# Altium PCB Педаль. Плата..PcbDoc
Units mm, origin at the board's own origin, x right, y up, seen from the top; angles counter-clockwise.
Board outline 25 x 25 mm, 2 copper layers (Top Layer, Bottom Layer), stack 1.07 mm thick; 13 components, 12 nets, 37 pads, 9 vias.
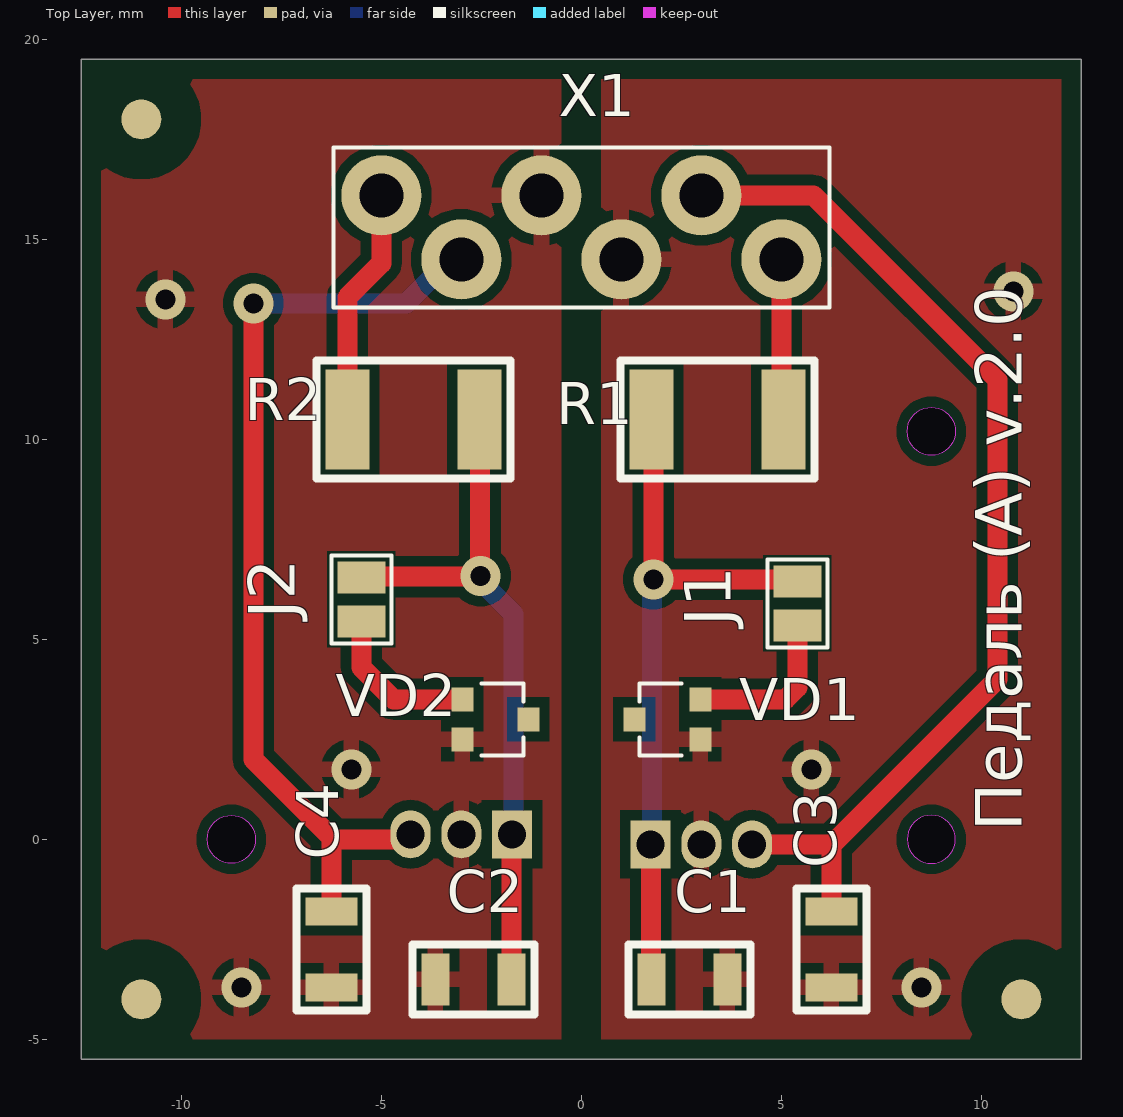
[diagram p0: Top Layer view]
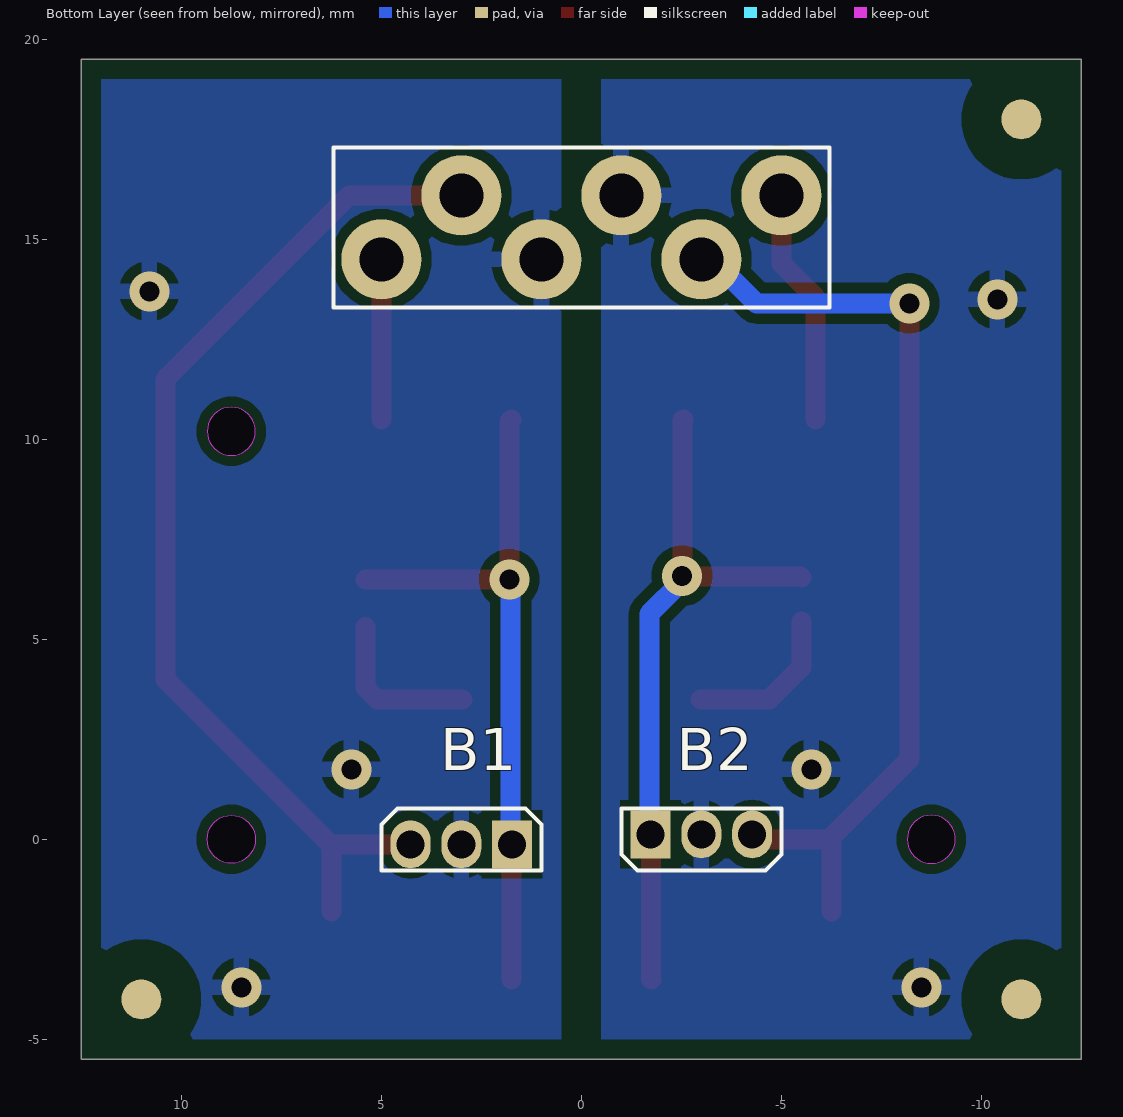
[diagram p1: Bottom Layer view, seen from below]
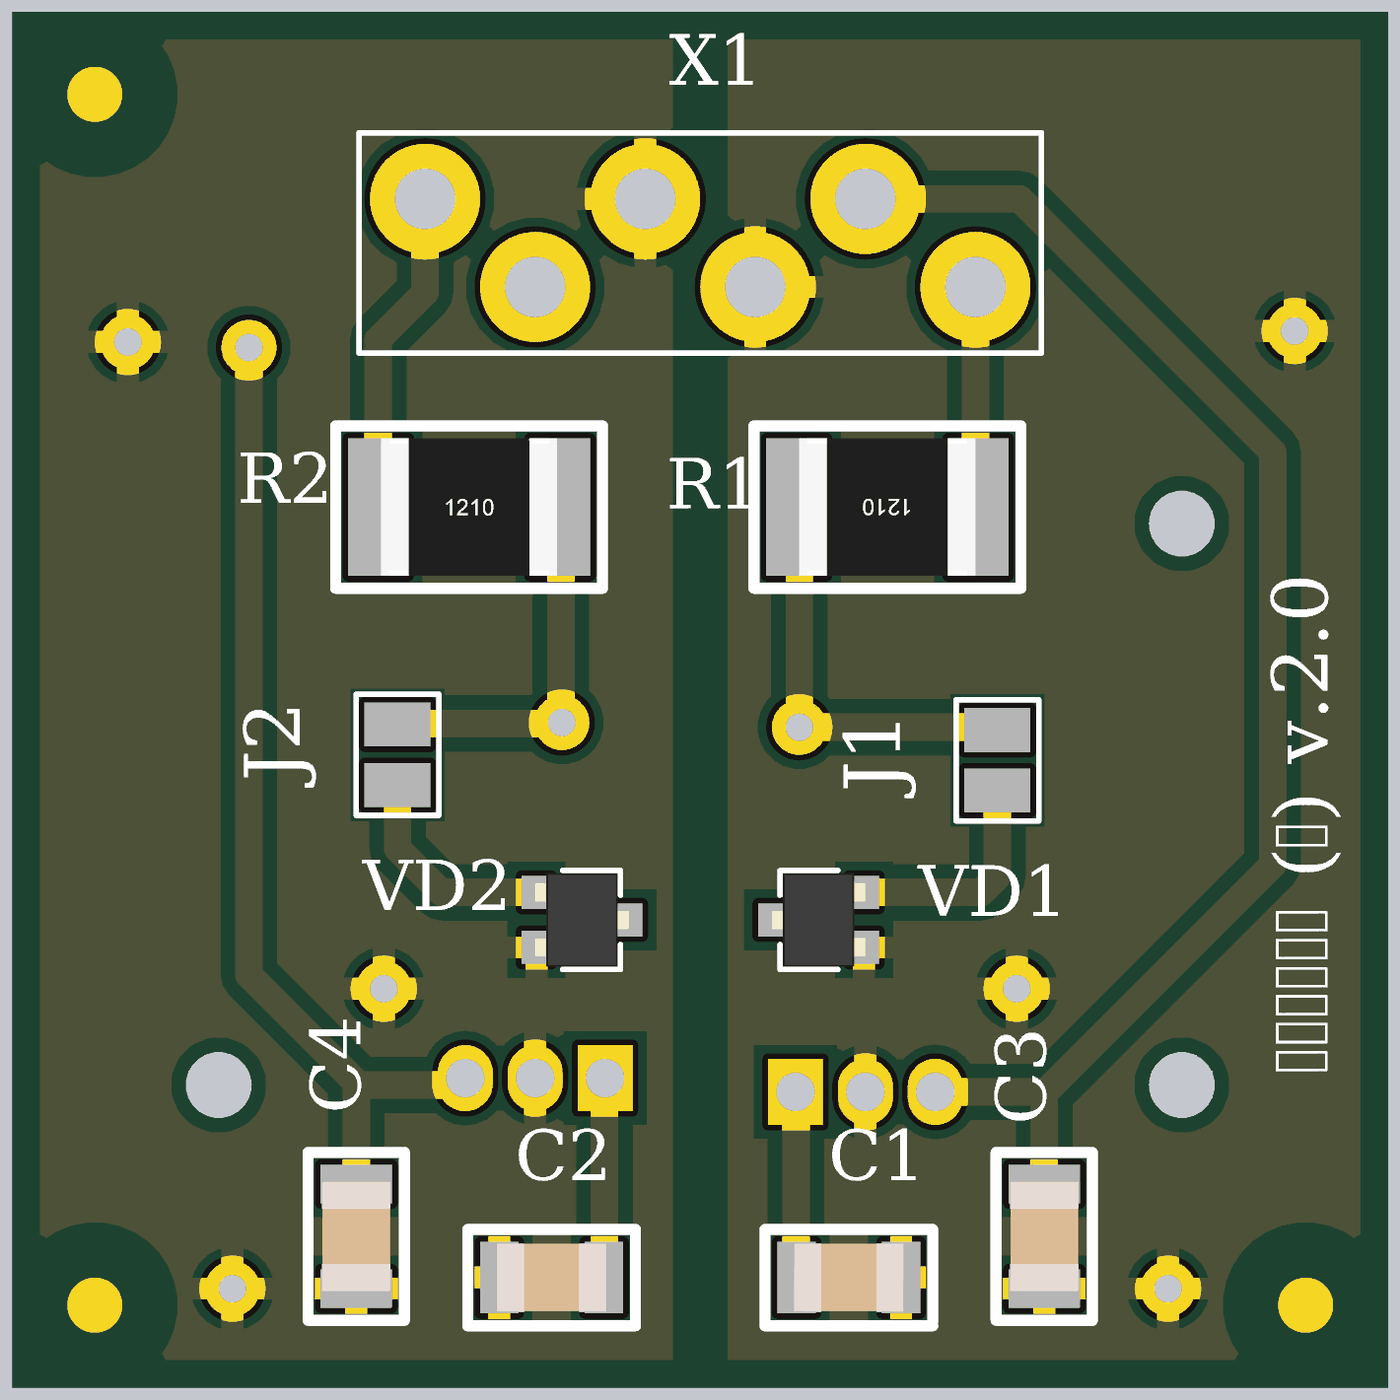
[diagram p2: 3D render of the assembled board from above, using the file's embedded part models]

## Layer stack, top to bottom
Top Solder: solder mask 0.01, Solder Resist, Dk 3.5
Top Layer: signal copper 0.035
Dielectric 1: dielectric 1, FR-4, Dk 4.8
Bottom Layer: signal copper 0.035
Bottom Solder: solder mask 0.01, Solder Resist, Dk 3.5

## Board outline
-12.5,-5.5 12.5,-5.5 12.5,19.5 -12.5,19.5
cut-out: 8.75,9.6 cw(c8.75,10.2) 8.15,10.2 cw(c8.75,10.2) 8.75,10.8 cw(c8.75,10.2) 9.35,10.2 cw(c8.75,10.2)
cut-out: 8.15,0 ccw(c8.75,0) 8.75,-0.6 ccw(c8.75,0) 9.35,0 ccw(c8.75,0) 8.75,0.6 ccw(c8.75,0)
cut-out: -8.75,-0.6 cw(c-8.75,0) -9.35,0 cw(c-8.75,0) -8.75,0.6 cw(c-8.75,0) -8.15,0 cw(c-8.75,0)

## Design rules (kind name [scope] priority, off if disabled: settings)
Clearance ReperPad_1.0mm [(ObjectKind = 'Pad') And (Component = 'Free')] p1: gap=1 ignorepadtopadclearanceinfootprint=FALSE
Clearance [All] p2: gap=0.254 ignorepadtopadclearanceinfootprint=FALSE except(0: Arc-Hole Track-Hole SMDPad-Hole THPad-Hole Via-Hole Fill-Hole Poly-Hole Region-Hole Text-Hole)
HoleSize [All] p1: absolutevalues=TRUE maxlimit=2.5 minlimit=0.3 maxpercent=80.000 minpercent=20.000
PolygonConnect [All] p1: connectstyle=Relief reliefconductorwidth=0.4 reliefentries=4 polygonreliefangle="90 Angle" airgapwidth=0.254
RoutingVias [All] p1: holewidth=0.3 width=0.6 viastyle="Through Hole" minholewidth=0.3 minwidth=0.6 maxholewidth=0.5 maxwidth=1
SolderMaskExpansion [All] p1: expansion=0.102 istentingtop=FALSE
Width [All] p1: maxlimit=2 minlimit=0.3 preferedwidth=0.3
29 further rules are at their usual default settings.

## Components (designator, comment, footprint, x,y, rotation, side; value= is the part's Value field where it differs from the comment)
B1 "TLE4997" PG-SSO-3-10 3,-0.125 r0 bottom locked
B2 "TLE4997" PG-SSO-3-10 -3,0.125 r180 bottom locked
C1 "47 нФ" C0805 2.7,-3.5 r180 top
C2 "47 нФ" C0805 -2.7,-3.5 r0 top
C3 "47 нФ" C0805 6.25,-2.75 r90 top
C4 "47 нФ" C0805 -6.25,-2.75 r90 top
J1 "" J-2x2-2.5 5.4,5.9 r90 top
J2 "" J-2x2-2.5 -5.5,6 r90 top
R1 "3 Ом" R1210 3.4,10.5 r180 top
R2 "3 Ом" R1210 -4.2,10.5 r0 top
VD1 "BZB984-C6V2" SOT-663 2.15,3 r90 top
VD2 "BZB984-C6V2" SOT-663 -2.15,3 r270 top
X1 "" "Датчик ПАЭ-2" 0,15.3 r180 top locked

## Footprints (in the part's own frame and the unit in brackets; to place one, negate y for a bottom-side part, rotate by r counter-clockwise, add the part's x,y. Pads: shape width x height; smd on the part's side, far side on the other; paste and mask are expansions set on the pad)
C0805 [mm]
  rect 0.7x1.3 smd: 1(-0.95,0) 2(0.95,0)
  silkscreen extent -1.53,-0.87 1.53,0.87, body extent -1,-0.62 1,0.63, height 0.6
J-2x2-2.5 [mm]
  rect 0.8x1.2 smd: 1(-0.55,0) 2(0.55,0)
  silkscreen extent -1.1,-0.75 1.1,0.75, body extent -0.8,-0.5 0.8,0.5, height 0.6
PG-SSO-3-10 [mm]
  rect 1x1.2 hole 0.7: 1(-1.27,0)
  oval 1x1.2 hole 0.7: 2(0,0) 3(1.27,0)
  silkscreen extent -2,-0.9 2,0.65, body extent -2.03,-0.86 2.03,0.64, height 7.55
R1210 [mm]
  rect 1.1x2.5 smd: 1(-1.65,0) 2(1.65,0)
  silkscreen extent -2.42,-1.48 2.42,1.48, body extent -1.6,-1.25 1.6,1.25, height 0.6
SOT-663 [mm]
  rect 0.6x0.55 smd: 1(-0.5,-0.825) 2(0.5,-0.825) 3(0,0.825)
  silkscreen extent -0.9,-0.35 0.9,0.7, body extent -0.85,-0.85 0.85,0.85, height 0.6
"Датчик ПАЭ-2" [mm]
  round 2 hole 1.1: 1(-5,0.8) 2(-1,0.8) 3(3,0.8) 4(-3,-0.8) 5(1,-0.8) 6(5,-0.8)
  silkscreen extent -6.2,-2 6.2,2

## Part data
B1 B2: "Hall Effect Sensor Single Axis PG-SSO-3-92", Case=PG-SSO-3-92, Manufacture="Infineon Technologies", HelpURL=https://www.digikey.com/en/products/detail/infineon-technologies/TLE4997E2XALA1/2081764, Model=TLE4997E2XALA1, Name="Датчик Холла"
C1 C2 C3 C4: library part Capacity, "0.047 µF ±5% 50V Ceramic Capacitor X7R 0805 (2012 Metric)", Case=0805, Manufacture=YAGEO, Tolerance=±5%, Voltage="50 В", HelpURL=https://www.digikey.com/en/products/detail/yageo/CC0805JRX7R9BB473/5884130?s=N4IgTCBcDaIMJwAwA5EFYBSAlAGgdiwE4AhYgFjwGYQBdAXyA, Model=CC0805JRX7R9BB473, Name=Конденсатор
J1 J2: library part Jamper, Name=Перемычка
R1 R2: library part Resistor, "20 Ohms ±5% 0.5W, 1/2W Chip Resistor 1210 (3225 Metric) Moisture Resistant Thick Film", Case=1210, Manufacture=YAGEO, Power=0,5Вт, Tolerance=±5%, HelpURL=https://www.digikey.com/en/products/detail/yageo/RC1210JR-0720RL/5919893?s=N4IgTCBcDaIEoGECMYkAYBScC0aDsYacAMgAQgC6AvkA, Model=RC1210FR-073RL, Name=Резистор
VD1 VD2: library part BZB984-C6V2,115, "Zener Diode Array 1 Pair Common Anode 6.2 V 265 mW ±5% SOT-663", Case=SOT-663, Manufacture="NXP Semiconductors", HelpURL=https://www.digikey.com/en/products/detail/rochester-electronics-llc/BZB984-C6V2-115/13431733, Model=BZB984-C6V2,115, Name=Стабилитрон
X1: library part "Разъем на плате-06", Name=Разъем, Конт.1="+5В APS 1", Конт.2="GND APS 1", Конт.3="Сигнал APS 2", Конт.4="Сигнал APS 1", Конт.5="GND APS 2", Конт.6="+5В APS 2"

## Free pads (board coordinates)
  round 1 all layers, no hole paste+0 mask+0: 0(-11,-4) 0(-11,18) 0(11,-4)

## Via types
v1: diameter 1, hole 0.5, Top Layer to Bottom Layer, 9 vias

## Nets (pads, with @x,y where several pads share a name; then routed paths per layer and width w, separated by ;. In a path a pad name is that pad's centre, name@x,y a point inside that pad or via, vN(x,y) a via of type N, cw(c..) or ccw(c..) an arc to the next point about the centre after c; other vN are vias at no path point)
+V1: R1.1 X1.1 | length 4
  Top Layer w0.5: R1.1@5,10.5 X1.1
+V2: R2.1 X1.6 | length 6
  Top Layer w0.5: R2.1 -5.85,13.55 -5,14.4 X1.6
GND1: B1.2 C1.1 C3.1 VD1.1 X1.2
  other v1: 8.5,-3.7 5.75,1.75 10.8,13.7
GND2: B2.2 C2.1 C4.1 VD2.2 X1.5
  other v1: -8.5,-3.7 -5.75,1.75 -10.4,13.5
NetJ1_1: J1.1 VD1.2 | length 4.1
  Top Layer w0.5: VD1.2 5.107,3.5 5.4,3.793 J1.1@5.4,5.304
NetJ2_1: J2.1 VD2.1 | length 4
  Top Layer w0.5: J2.1 -5.5,4.3 -4.7,3.5 VD2.1
NetVD1_3: VD1.3
NetVD2_3: VD2.3
"Out 1": B1.3 C3.2 X1.4 | length 26.3
  Top Layer w0.5: X1.4 5.8,16.1 10.4,11.5 10.4,4 6.25,-0.15 C3.2 ; B1.3 6.25,-0.125
"Out 2": B2.3 C4.2 X1.3 | length 23.7
  Top Layer w0.5: v1(-8.2,13.4) -8.2,2 -6.25,0.05 C4.2 ; -6.25,0 -4.395,0 B2.3
  Bottom Layer w0.5: v1(-8.2,13.4) -4.375,13.4 -3.275,14.5 X1.3
VCC1: B1.1 C1.2 J1.2 R1.2 | length 17.7
  Top Layer w0.5: B1.1 1.74,-0.135 1.74,-3.49 C1.2 ; R1.2 1.8,10.45 v1(1.8,6.5) J1.2@5.4,6.5
  Bottom Layer w0.5: B1.1 1.765,-0.09 1.765,6.465 v1(1.8,6.5)
VCC2: B2.1 C2.2 J2.2 R2.2 | length 17.4
  Top Layer w0.5: J2.2 -5.482,6.568 -2.532,6.568 v1(-2.514,6.586) -2.532,6.603 -2.532,10.482 R2.2 ; C2.2 -1.74,-3.49 -1.74,0.115 B2.1
  Bottom Layer w0.5: v1(-2.514,6.586) -2.514,6.45 -1.7,5.636 -1.7,0.155 B2.1

## Polygon pours and split planes (outlines as drawn)
GND1 on Bottom Layer "GND1_L02_P000" (solid, pour order 0): 0.5,19 12,19 12,-5 0.5,-5
GND2 on Bottom Layer "GND2_L02_P001" (solid, pour order 1): -0.5,19 -12,19 -12,-5 -0.5,-5
GND2 on Top Layer "GND2_L01_P003" (solid, pour order 3): -0.5,19 -12,19 -12,-5 -0.5,-5
GND1 on Top Layer "GND1_L01_P002" (solid, pour order 2): 0.5,19 12,19 12,-5 0.5,-5

## Silkscreen, mask and mechanical layers (free items; w line width, h text height)
Top Overlay:
  text "Педаль (А) v.2.0" at 11.394,0.2 h2 r90
Border:
  circle w0.1: c8.75,10.2 r0.6
  circle w0.1: c8.75,0 r0.6
  circle w0.1: c-8.75,0 r0.6
  lines w0.1: -12.5,-5.5 -12.5,19.5 12.5,19.5 12.5,-5.5 -12.5,-5.5